# EAGLE board LCD LED (EAGLE 6.5.0)
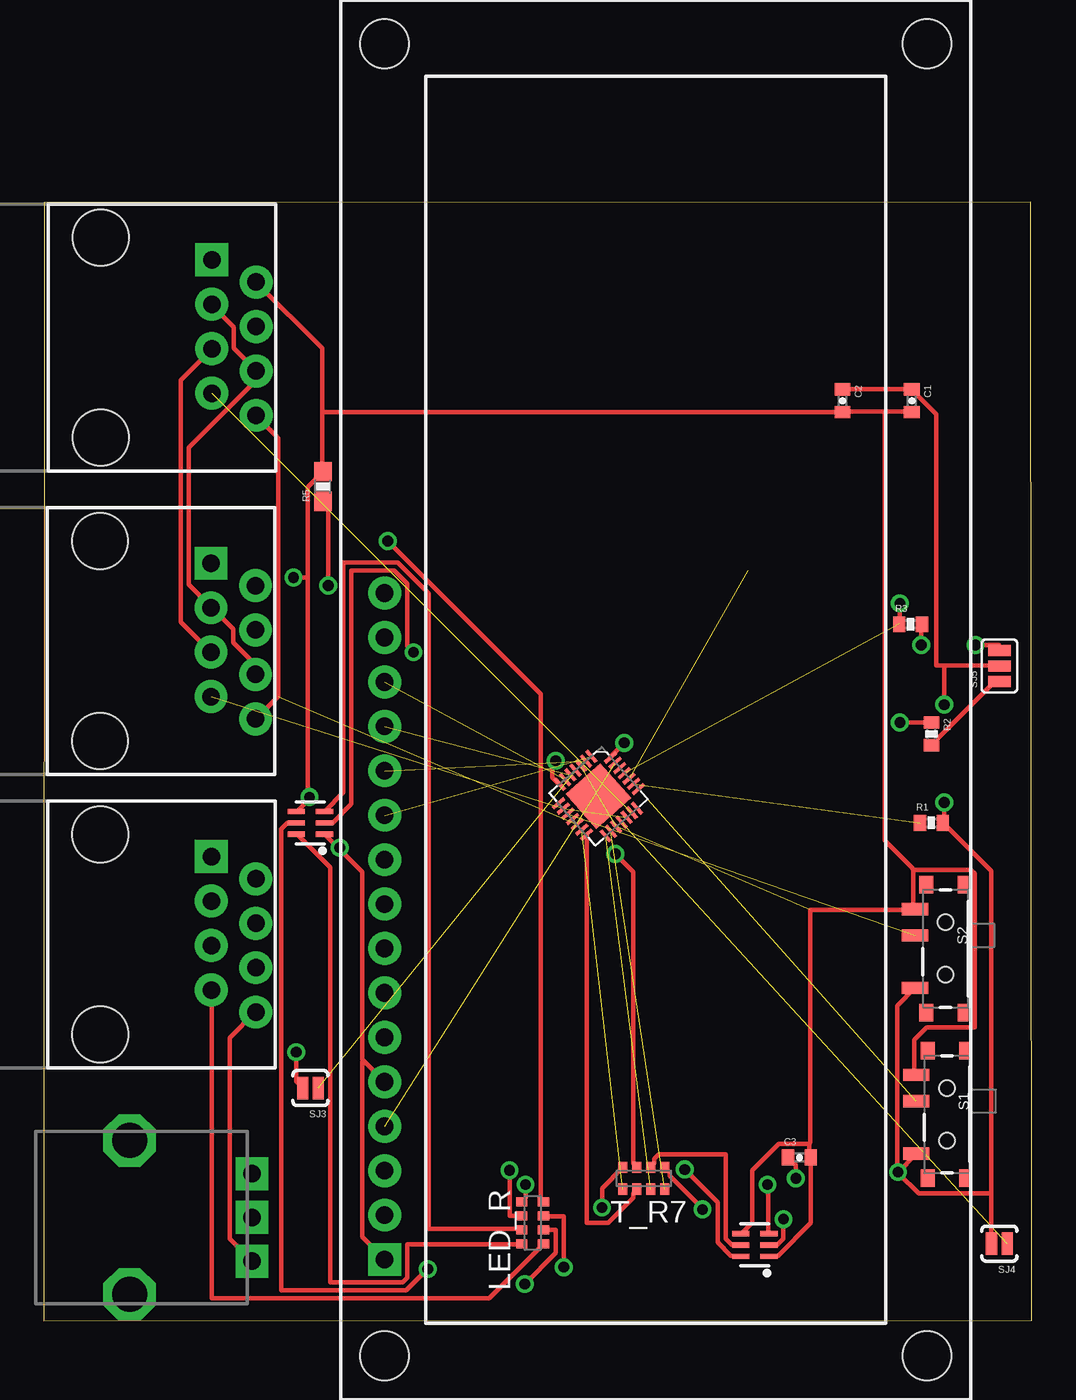
[diagram p0: board, top side]
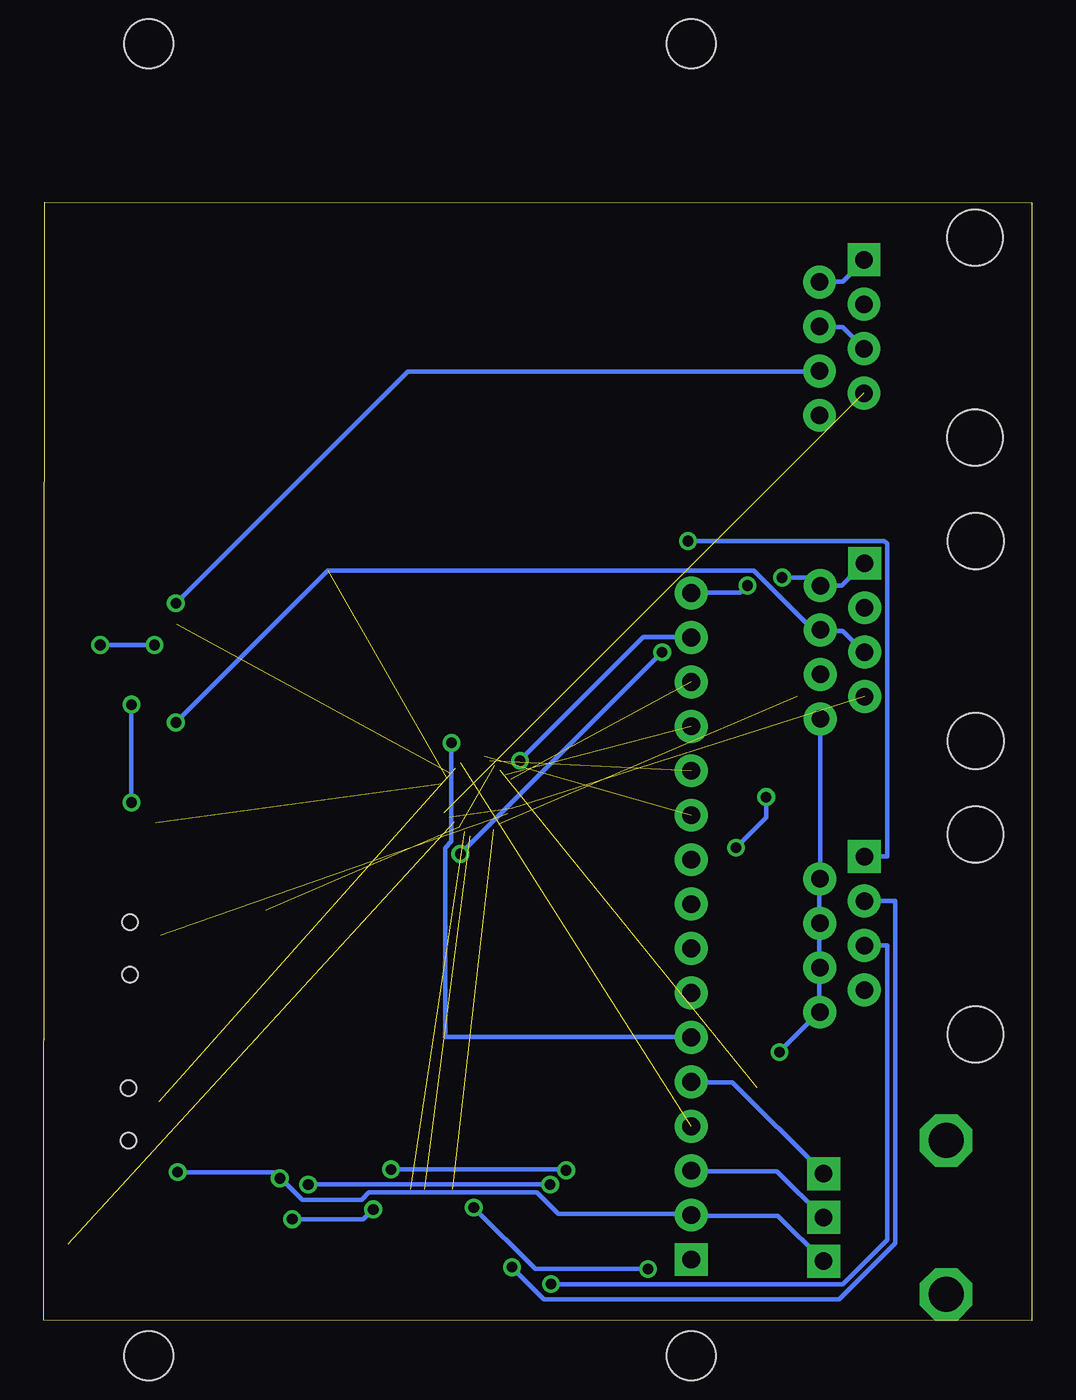
[diagram p1: board, bottom side, seen from below]

Size 56.47 x 63.96 mm. Coordinates in mm from the lower left corner, seen from the top.
Outline: 0,0 56.47,0.03 56.41,63.96 0.02,63.93 0,0
Copper layers (1*16): Top 0.035mm / dielectric 1.5mm / Bottom 0.035mm
Design rules "default": minimum track width 10mil, minimum drill 24mil, track to track 8mil, track to pad 8mil, pad to pad 8mil, via to via 8mil, smd to smd 8mil, copper to edge 40mil, drill to drill 8mil, minimum pad ring 10mil, minimum via ring 8mil, stop-mask expansion 4mil, vias tented up to drill 0mil, thermal gap 10mil

## Footprints (pad centres in the part's own frame; a part is rotated, then mirrored left to right if it is on the bottom)
0402-CAP = smd 0.7 x 0.9: 1 -0.65,0; 2 0.65,0
ALPS_POT = drill 1 pad 1.88 square: P$1 7,-2.5; P$2 7,0; P$3 7,2.5 | drill 2 octagon: P$4 0,-4.4; P$5 0,4.4
RJ45-8 = drill 1 pad 1.88 square: 1 -4.445,6.35 | drill 1 pad 1.88: 2 -3.175,8.89; 3 -1.905,6.35; 4 -0.635,8.89; 5 0.635,6.35; 6 1.905,8.89; 7 3.175,6.35; 8 4.445,8.89 | hole 3.2: -5.715,0; 5.715,0
LCD-16X2 = drill 1.016 pad 1.88 square: 1 -32,15.5 | drill 1.016 pad 1.88: 2 -29.46,15.5; 3 -26.92,15.5; 4 -24.38,15.5; 5 -21.84,15.5; 6 -19.3,15.5; 7 -16.76,15.5; 8 -14.22,15.5; 9 -11.68,15.5; 10 -9.14,15.5; 11 -6.6,15.5; 12 -4.06,15.5; 13 -1.52,15.5; 14 1.02,15.5; 15 3.56,15.5; 16 6.1,15.5 | hole 2.8: -37.5,15.5; -37.5,-15.5; 37.5,15.5; 37.5,-15.5
0603-ARV = smd 0.5 x 0.65: 1 -1.2,-0.625; 2 -0.4,-0.625; 3 0.4,-0.625; 4 1.2,-0.625; 5 1.2,0.625; 6 0.4,0.625; 7 -0.4,0.625; 8 -1.2,0.625
0402-RES = smd 0.7 x 0.9: 1 -0.65,0; 2 0.65,0
0603-RES = smd 1.1 x 1: 1 -0.85,0; 2 0.85,0
SWITCH-SPST-SMD-A = smd 0.7 x 1.5: 1 -2.25,-1.75; 2 -0.75,-1.75; 3 2.25,-1.75 | smd 1 x 0.6: GND1 -3.65,1; GND3 3.65,1 | smd 1 x 0.8: GND2 -3.65,-1.1; GND4 3.65,-1.1 | hole 0.9: -1.5,0; 1.5,0
SJ_2S-NO = smd 0.635 x 1.27: 1 -0.45,0; 2 0.45,0
SJ_3 = smd 0.635 x 1.27: 1 -0.889,0; 2 0,0; 3 0.889,0
SOT363 = smd 0.3 x 0.99: 1 -0.65,-0.8; 2 0,-0.8; 3 0.65,-0.8; 4 0.65,0.81; 5 0,0.81; 6 -0.65,0.81
QFN-28 = smd 0.85 x 0.2: 1 -1.975,1.2; 2 -1.975,0.8; 3 -1.975,0.4; 4 -1.975,0; 5 -1.975,-0.4; 6 -1.975,-0.8; 7 -1.975,-1.2; 15 1.975,-1.2; 16 1.975,-0.8; 17 1.975,-0.4; 18 1.975,0; 19 1.975,0.4; 20 1.975,0.8; 21 1.975,1.2 | smd 0.2 x 0.85: 8 -1.2,-1.975; 9 -0.8,-1.975; 10 -0.4,-1.975; 11 0,-1.975; 12 0.4,-1.975; 13 0.8,-1.975; 14 1.2,-1.975; 22 1.2,1.975; 23 0.8,1.975; 24 0.4,1.975; 25 0,1.975; 26 -0.4,1.975; 27 -0.8,1.975; 28 -1.2,1.975 | smd 2.65 x 2.65: 29 0,0

## Placement (x,y rotation side)
C1  0.1uF  [0402-CAP]  49.61,52.6 270 top
C2  0.1uF  [0402-CAP]  45.64,52.6 270 top
C3  0.1uF  [0402-CAP]  43.18,9.35 0 top
CONTRAST  [ALPS_POT]  4.9,5.92 0 top
CUSOM_LED1  RJ45-8PTH  [RJ45-8]  3.23,22.1 270 top
I2CIN  RJ45-8PTH  [RJ45-8]  3.25,56.21 270 top
I2COUT  RJ45-8PTH  [RJ45-8]  3.21,38.86 270 top
LCD1  LCD-16X2SILK  [LCD-16X2]  34.98,35.51 90 top
LED_R  [0603-ARV]  27.94,5.61 270 top
R1  10k  [0402-RES]  50.72,28.47 0 top
R2  10k  [0402-RES]  50.72,33.55 270 top
R3  10k  [0402-RES]  49.53,39.83 0 top
R5  [0603-RES]  15.95,47.7 90 top
S1  [SWITCH-SPST-SMD-A]  51.61,11.81 270 top
S2  [SWITCH-SPST-SMD-A]  51.54,21.29 270 top
SJ3  [SJ_2S-NO]  15.24,13.31 180 top
SJ4  [SJ_2S-NO]  54.61,4.42 180 top
SJ5  [SJ_3]  54.61,37.44 90 top
T1  MMDT3904  [SOT363]  15.24,28.47 90 top
T_R7  [0603-ARV]  34.29,8.15 0 top
U1  SX1509  [QFN-28]  31.7,30 311.5 top
U$4  MMDT3904  [SOT363]  40.64,4.34 90 top

## Library data of the parts
C1-C3 LED_R R1-R3 SJ3-SJ5 T_R7 = SparkFun-Passives
CONTRAST S1 S2 = SparkFun-Electromechanical
CUSOM_LED1 I2CIN I2COUT = SparkFun-Connectors
LCD1 = SparkFun-Displays
R5 = SparkFun-Resistors
T1 U$4 = SparkFun-DiscreteSemi
U1 = SparkFun-DigitalIC

## Nets
3.3V: C1.1 C2.1 C3.1 CONTRAST.P$1 CUSOM_LED1.2 CUSOM_LED1.4 CUSOM_LED1.6 CUSOM_LED1.8 I2CIN.8 I2COUT.8 LCD1.2 R1.2 S1.3 S2.3 SJ3.2 SJ4.2 SJ5.2 U1.12
ADDR0: S1.2 U1.26
ADDR1: S2.2 U1.10
G1: T1.5 T_R7.8
G2: T1.2 T_R7.7
G3: T_R7.6 U$4.5
G4: T_R7.5 U$4.2
GND: C1.2 C2.2 C3.2 CONTRAST.P$3 I2CIN.1 I2CIN.2 I2COUT.1 I2COUT.2 LCD1.1 LCD1.5 R5.2 S1.1 S2.1 T1.1 T1.4 U1.3 U1.17 U1.29 U$4.1 U$4.4
INTERRUPT_EXTERNAL: I2CIN.7 U1.20
INTERRUPT_INTERNAL: I2COUT.7 U1.9 U1.19
IO7: U1.8
IO14: U1.21
IO15: U1.22
LCD_BACKLIGHT: LCD1.15 U1.7
LCD_CONTRAST: CONTRAST.P$2 LCD1.3
LCD_D0: LCD1.7
LCD_D1: LCD1.8
LCD_D2: LCD1.9
LCD_D3: LCD1.10
LCD_D4: LCD1.11 U1.1
LCD_D5: LCD1.12 U1.2
LCD_D6: LCD1.13 U1.5
LCD_D7: LCD1.14 U1.6
LCD_E: LCD1.6 U1.28
LCD_RS: LCD1.4 U1.27
LED_1: T_R7.1 U1.13
LED_2: T_R7.2 U1.14
LED_3: T_R7.3 U1.15
LED_4: T_R7.4 U1.16
N$1: R3.2 SJ5.3
N$2: R2.2 SJ5.1
N$8: CUSOM_LED1.1 LED_R.8
N$9: LCD1.16 R5.1
N$10: CUSOM_LED1.3 LED_R.7
N$11: CUSOM_LED1.5 LED_R.6
N$12: CUSOM_LED1.7 LED_R.5
N$13: LED_R.1 U$4.3
N$14: LED_R.2 U$4.6
N$15: LED_R.3 T1.3
N$16: LED_R.4 T1.6
NRESET: R1.1 U1.23
OSCIO: U1.11
SCL: I2CIN.3 I2CIN.6 I2COUT.3 I2COUT.6 R3.1 U1.25
SDA: I2CIN.4 I2CIN.5 I2COUT.4 I2COUT.5 R2.1 U1.24
VCC1: SJ3.1 U1.4
VCC2: SJ4.1 U1.18

## Tracks (layer width: path | path; a pad name or v marks a point on that pad's centre or on a via)
3.3V  (via drill 0.61)  (1 unrouted)
  Top 0.254: C2.1 45.67,53.26 49.58,53.26 C1.1 49.68,53.16 51,51.84 51,37.47 51.46,37.47 | 51.46,37.47 54.61,37.47 SJ5.2 | v42.98,8.15 42.98,8.92 42.57,9.32 C3.1 | v48.82,8.51 49.84,9.53 S1.3 | S2.3 48.77,18.01 48.77,8.61 v48.82,8.51 | 54.15,7.29 54.15,4.45 SJ4.2 | 54.15,7.29 54.15,25.73 51.41,28.47 R1.2 51.46,28.58 v51.46,29.64 | 54.15,7.29 49.99,7.29 48.87,8.41 v48.82,8.51 | v51.46,35.23 51.46,37.47 | v14.43,15.37 14.43,13.69 14.78,13.34 SJ3.2 | I2CIN.8 12.14,51.74 13.41,50.47 13.41,35.69 12.14,34.42 I2COUT.8 | CONTRAST.P$1 11.89,3.43 10.62,4.7 10.62,16.18 12.09,17.65 CUSOM_LED1.8
  Bottom 0.254: v48.82,8.51 43.33,8.51 v42.98,8.15 42.88,8.1 41.71,6.93 38.3,6.93 37.9,7.34 28.3,7.34 27.08,6.12 19.56,6.12 LCD1.2 19.46,6.02 14.53,6.02 11.94,3.43 CONTRAST.P$1 | v51.46,29.64 v51.46,35.23 | v14.43,15.37 12.14,17.65 CUSOM_LED1.8 12.14,17.75 12.14,20.19 CUSOM_LED1.6 12.14,20.29 12.14,22.73 CUSOM_LED1.4 12.14,22.83 12.14,25.27 CUSOM_LED1.2 12.09,25.37 I2COUT.8
ADDR0  (1 unrouted)
ADDR1  (1 unrouted)
G1  (via drill 0.61)
  Top 0.254: v31.9,6.48 31.9,7.59 33.07,8.76 T_R7.8 | v21.95,2.97 20.73,1.75 13.56,1.75 13.56,28.12 13.92,28.47 T1.5
  Bottom 0.254: v31.9,6.48 28.4,2.97 v21.95,2.97
G2  (via drill 0.61)
  Top 0.254: v32.66,26.7 33.68,25.68 33.68,9.02 33.88,8.81 T_R7.7 | v21.13,38.23 20.78,38.58 20.78,42.14 20.02,42.9 17.58,42.9 17.58,29.54 16.51,28.47 T1.2
  Bottom 0.254: v21.13,38.23 v32.66,26.7
G3
  Top 0.254: U$4.5 39.32,4.34 38.96,4.7 38.96,9.53 35.15,9.53 34.9,9.27 34.9,9.02 34.7,8.81 T_R7.6
G4  (via drill 0.61)
  Top 0.254: v37.64,6.38 37.64,6.43 35.76,8.31 35.76,8.51 35.51,8.76 T_R7.5 | v42.27,5.82 42.27,4.7 41.91,4.34 U$4.2
  Bottom 0.254: v37.64,6.38 38.2,5.82 v42.27,5.82
GND  (via drill 0.61)  (3 unrouted)
  Top 0.254: 48.06,51.99 49.58,51.99 C1.2 | 48.06,51.99 45.67,51.99 C2.2 45.52,51.94 15.9,51.94 | U$4.1 41.45,3.73 41.96,3.73 43.84,5.61 43.84,9.32 C3.2 43.74,9.42 43.74,10.13 | 43.74,10.13 42.01,10.13 40.49,8.61 40.49,5.61 39.88,5 U$4.4 | 43.74,10.13 43.79,10.24 43.79,23.5 49.78,23.5 S2.1 49.68,23.6 49.68,25.78 | 49.68,25.78 52.98,25.78 53.19,25.58 53.19,16.79 50.44,16.79 49.73,16.08 49.73,14.2 49.84,14.1 S1.1 | 48.06,51.99 48.06,27.46 49.63,25.88 49.68,25.78 | 16.87,27 18.19,25.68 18.19,14.96 18.26,14.88 | 16.87,27 16.05,27.81 T1.1 | 18.26,14.88 19.46,13.69 LCD1.5 | LCD1.1 19.46,3.53 18.19,4.8 18.19,14.81 18.26,14.88 | 15.09,42.49 15.09,47.68 15.95,48.54 R5.2 15.9,48.64 15.9,51.94 | 15.09,42.49 15.09,29.95 | 15.09,29.95 15.09,29.74 14.48,29.13 T1.4 | 15.09,42.49 v14.28,42.49 | 15.9,51.94 15.9,55.6 12.14,59.36 I2CIN.2 | v16.92,27.05 16.87,27 | v15.19,29.95 15.09,29.95
  Bottom 0.254: CONTRAST.P$3 11.94,8.46 17.12,13.64 19.46,13.64 LCD1.5 | I2CIN.1 9.6,60.63 10.82,59.41 12.14,59.41 I2CIN.2 | I2COUT.1 9.6,43.31 10.87,42.04 I2COUT.2 12.19,42.09 12.6,42.49 v14.28,42.49 | v16.92,27.05 15.19,28.78 v15.19,29.95
INTERRUPT_EXTERNAL  (1 unrouted)
INTERRUPT_INTERNAL  (2 unrouted)
LCD_BACKLIGHT  (via drill 0.61)
  Top 0.254: v29.26,32.03 29.06,31.83 29.06,31.06 29.46,30.66 U1.7
  Bottom 0.254: v29.26,32.03 22.2,39.09 19.51,39.09 LCD1.15
LCD_CONTRAST
  Bottom 0.254: CONTRAST.P$2 11.94,5.92 14.58,8.56 19.46,8.56 LCD1.3
LCD_D4  (1 unrouted)
LCD_D5  (1 unrouted)
LCD_D6  (1 unrouted)
LCD_D7  (1 unrouted)
LCD_E  (via drill 0.61)
  Top 0.254: v33.17,33.05 32.36,32.23 U1.28
  Bottom 0.254: v33.17,33.05 33.17,27.41 33.53,27.05 33.53,16.23 19.51,16.23 LCD1.6
LCD_RS  (1 unrouted)
LED_1  (1 unrouted)
LED_2
  Top 0.254: T_R7.2 33.88,7.49 33.68,7.29 33.68,7.04 32.26,5.61 31.04,5.61 31.04,27.76 U1.14
LED_3  (1 unrouted)
LED_4  (1 unrouted)
N$1  (via drill 0.61)
  Top 0.254: v50.14,38.63 50.14,39.8 R3.2 | v53.24,38.63 54.61,38.63 SJ5.3
  Bottom 0.254: v53.24,38.63 v50.14,38.63
N$2
  Top 0.254: SJ5.1 54.36,36.55 50.75,32.94 R2.2
N$8  (via drill 0.61)
  Top 0.254: v19.66,44.58 28.4,35.84 28.4,6.99 28.55,6.83 LED_R.8
  Bottom 0.254: v19.66,44.58 8.43,44.58 8.28,44.42 8.28,26.54 CUSOM_LED1.1
N$9  (via drill 0.61)
  Top 0.254: v16.26,42.04 16.26,46.51 15.95,46.81 R5.1
  Bottom 0.254: v16.26,42.04 16.66,41.63 19.46,41.63 LCD1.16
N$10  (via drill 0.61)
  Top 0.254: v29.72,3.07 29.72,5.97 28.6,5.97 LED_R.7
  Bottom 0.254: v29.72,3.07 27.89,1.24 11.02,1.24 7.82,4.45 7.82,24 CUSOM_LED1.3
N$11  (via drill 0.61)
  Top 0.254: v27.48,2.11 29.26,3.89 29.26,5.21 28.6,5.21 LED_R.6
  Bottom 0.254: v27.48,2.11 10.82,2.11 8.28,4.65 8.28,21.46 CUSOM_LED1.5
N$12
  Top 0.254: LED_R.5 28.55,4.39 25.45,1.3 9.6,1.3 9.6,18.92 CUSOM_LED1.7
N$13  (via drill 0.61)
  Top 0.254: v27.53,7.8 27.53,7.04 27.33,6.83 LED_R.1 | v41.35,7.8 41.4,7.75 41.4,5 U$4.3
  Bottom 0.254: v41.35,7.8 v27.53,7.8
N$14  (via drill 0.61)
  Top 0.254: v26.62,8.61 26.62,6.02 27.28,6.02 LED_R.2 | v36.63,8.66 38.51,6.78 38.51,4.5 39.27,3.73 39.83,3.73 U$4.6
  Bottom 0.254: v26.62,8.61 26.67,8.66 v36.63,8.66
N$15
  Top 0.254: LED_R.3 27.28,5.26 22,5.26 22,41.58 20.22,43.36 17.12,43.36 17.12,30.2 16.05,29.13 T1.3
N$16
  Top 0.254: LED_R.4 27.28,4.39 20.78,4.39 20.78,2.46 20.52,2.21 16.36,2.21 16.36,25.93 14.48,27.81 T1.6
NRESET  (1 unrouted)
SCL  (via drill 0.61)  (1 unrouted)
  Top 0.254: I2COUT.6 12.09,37.52 10.82,38.79 10.82,39.55 9.6,40.77 I2COUT.3 9.5,40.87 8.28,42.09 8.28,49.91 12.04,53.67 12.04,54.23 I2CIN.6 12.14,54.33 10.87,55.6 10.87,56.82 9.6,58.09 I2CIN.3 | v48.92,41.02 48.92,39.85 R3.1
  Bottom 0.254: v48.92,41.02 35.66,54.28 12.14,54.28 I2CIN.6
SDA  (via drill 0.61)  (1 unrouted)
  Top 0.254: v48.92,34.21 50.7,34.21 R2.1 | I2CIN.5 9.6,55.55 7.82,53.77 7.82,39.95 I2COUT.5
  Bottom 0.254: I2CIN.5 9.6,55.6 10.82,56.82 12.14,56.82 I2CIN.4 | v48.92,34.21 40.23,42.9 15.9,42.9 12.5,39.5 I2COUT.4 11.99,39.45 10.82,39.45 9.6,38.23 I2COUT.5
VCC1  (1 unrouted)
VCC2  (1 unrouted)